# Altium PCB Esquematico.PcbDoc
Units mm, origin at the board's own origin, x right, y up, seen from the top; angles counter-clockwise.
Board outline 110.33 x 115.65 mm, 2 copper layers (Top Layer, Bottom Layer); 132 components, 89 nets, 403 pads, 37 vias.
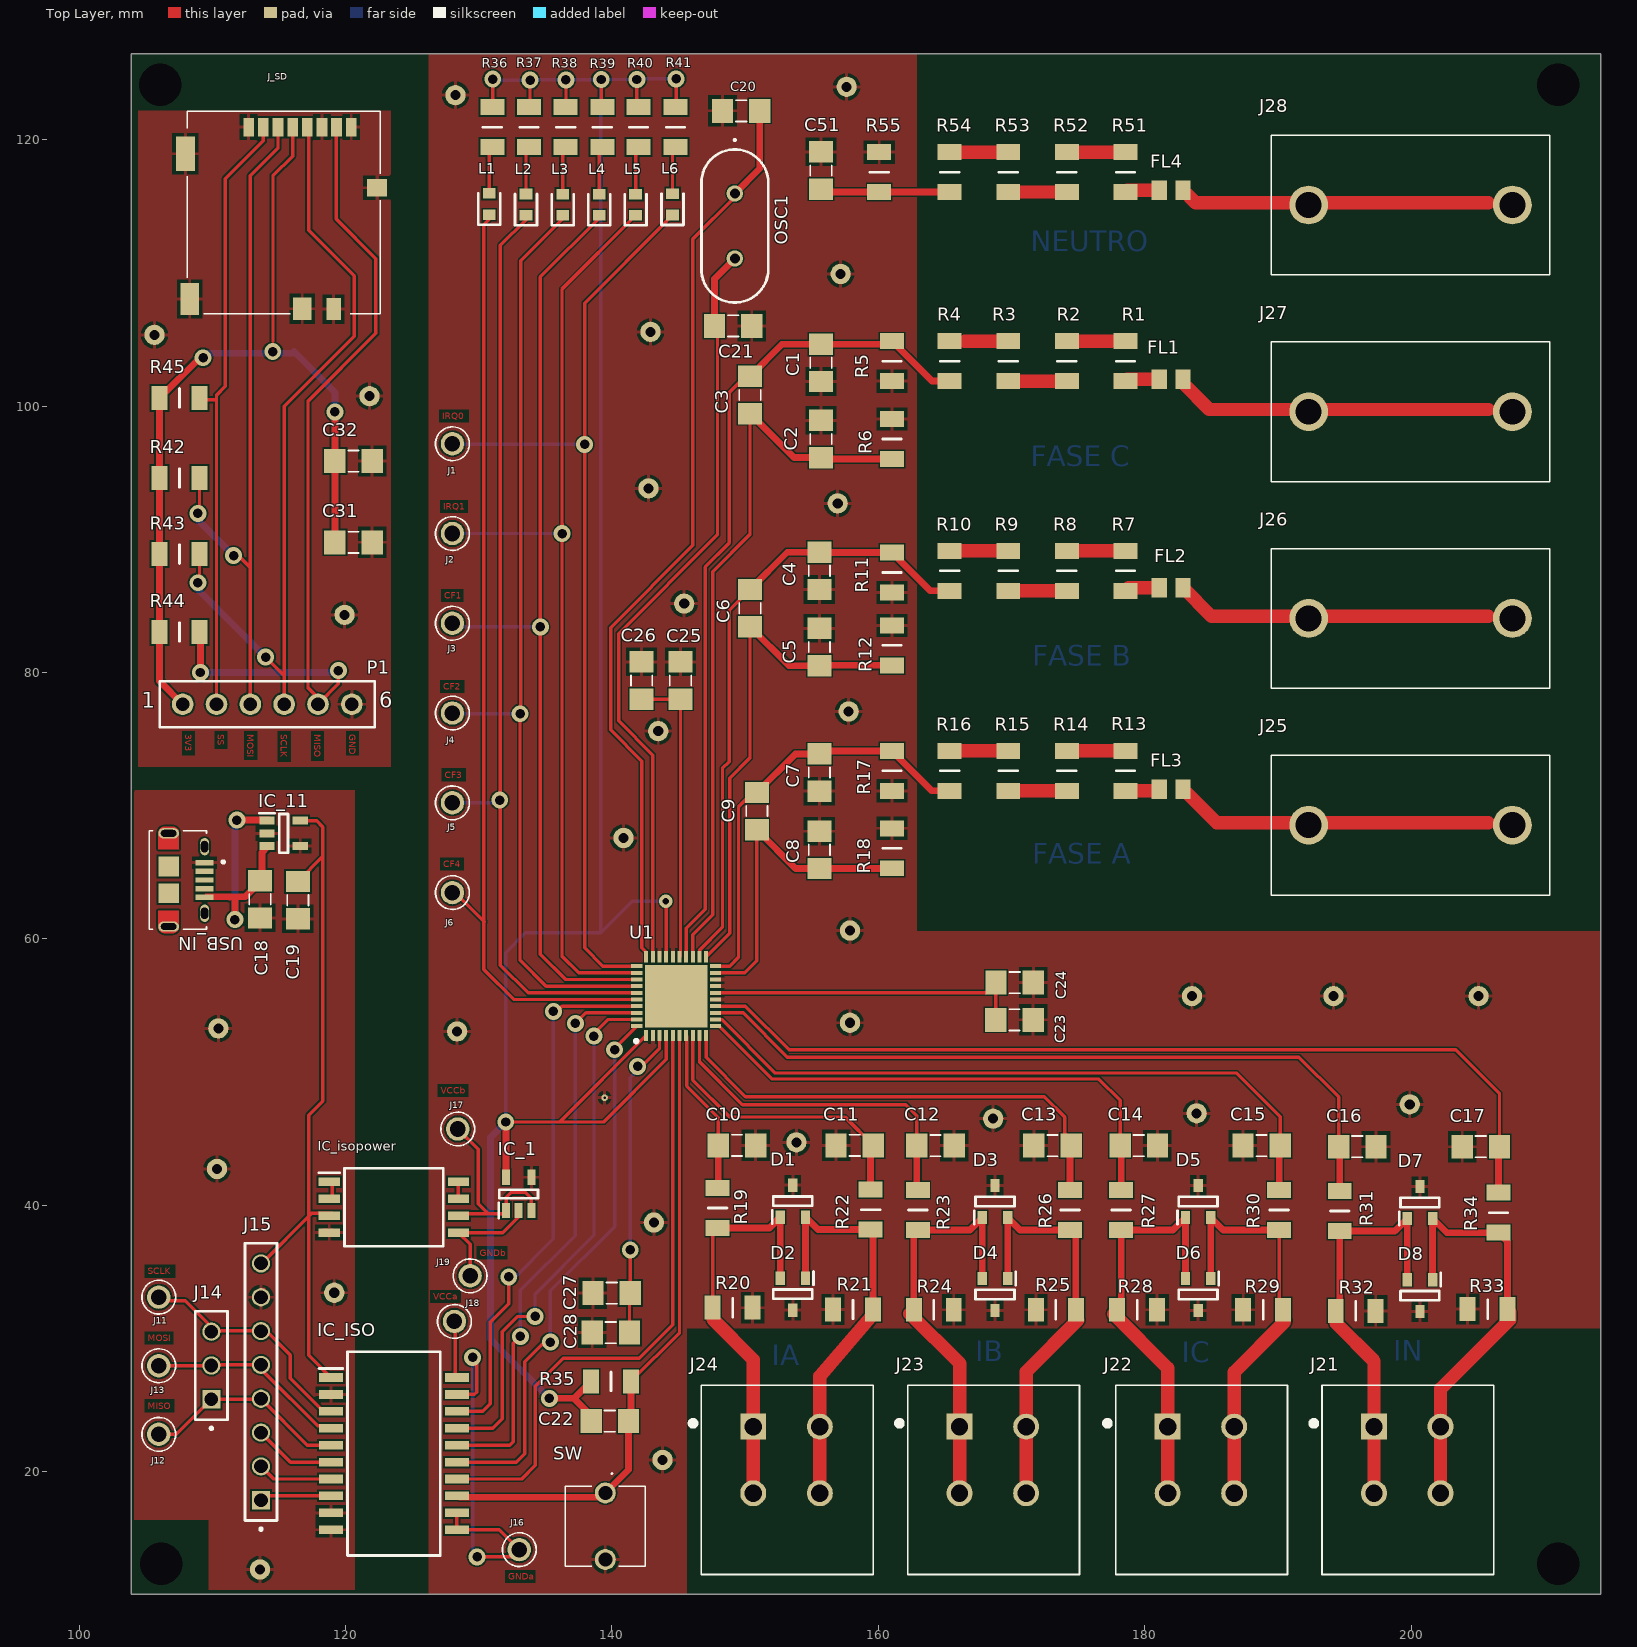
[diagram p0: Top Layer view]
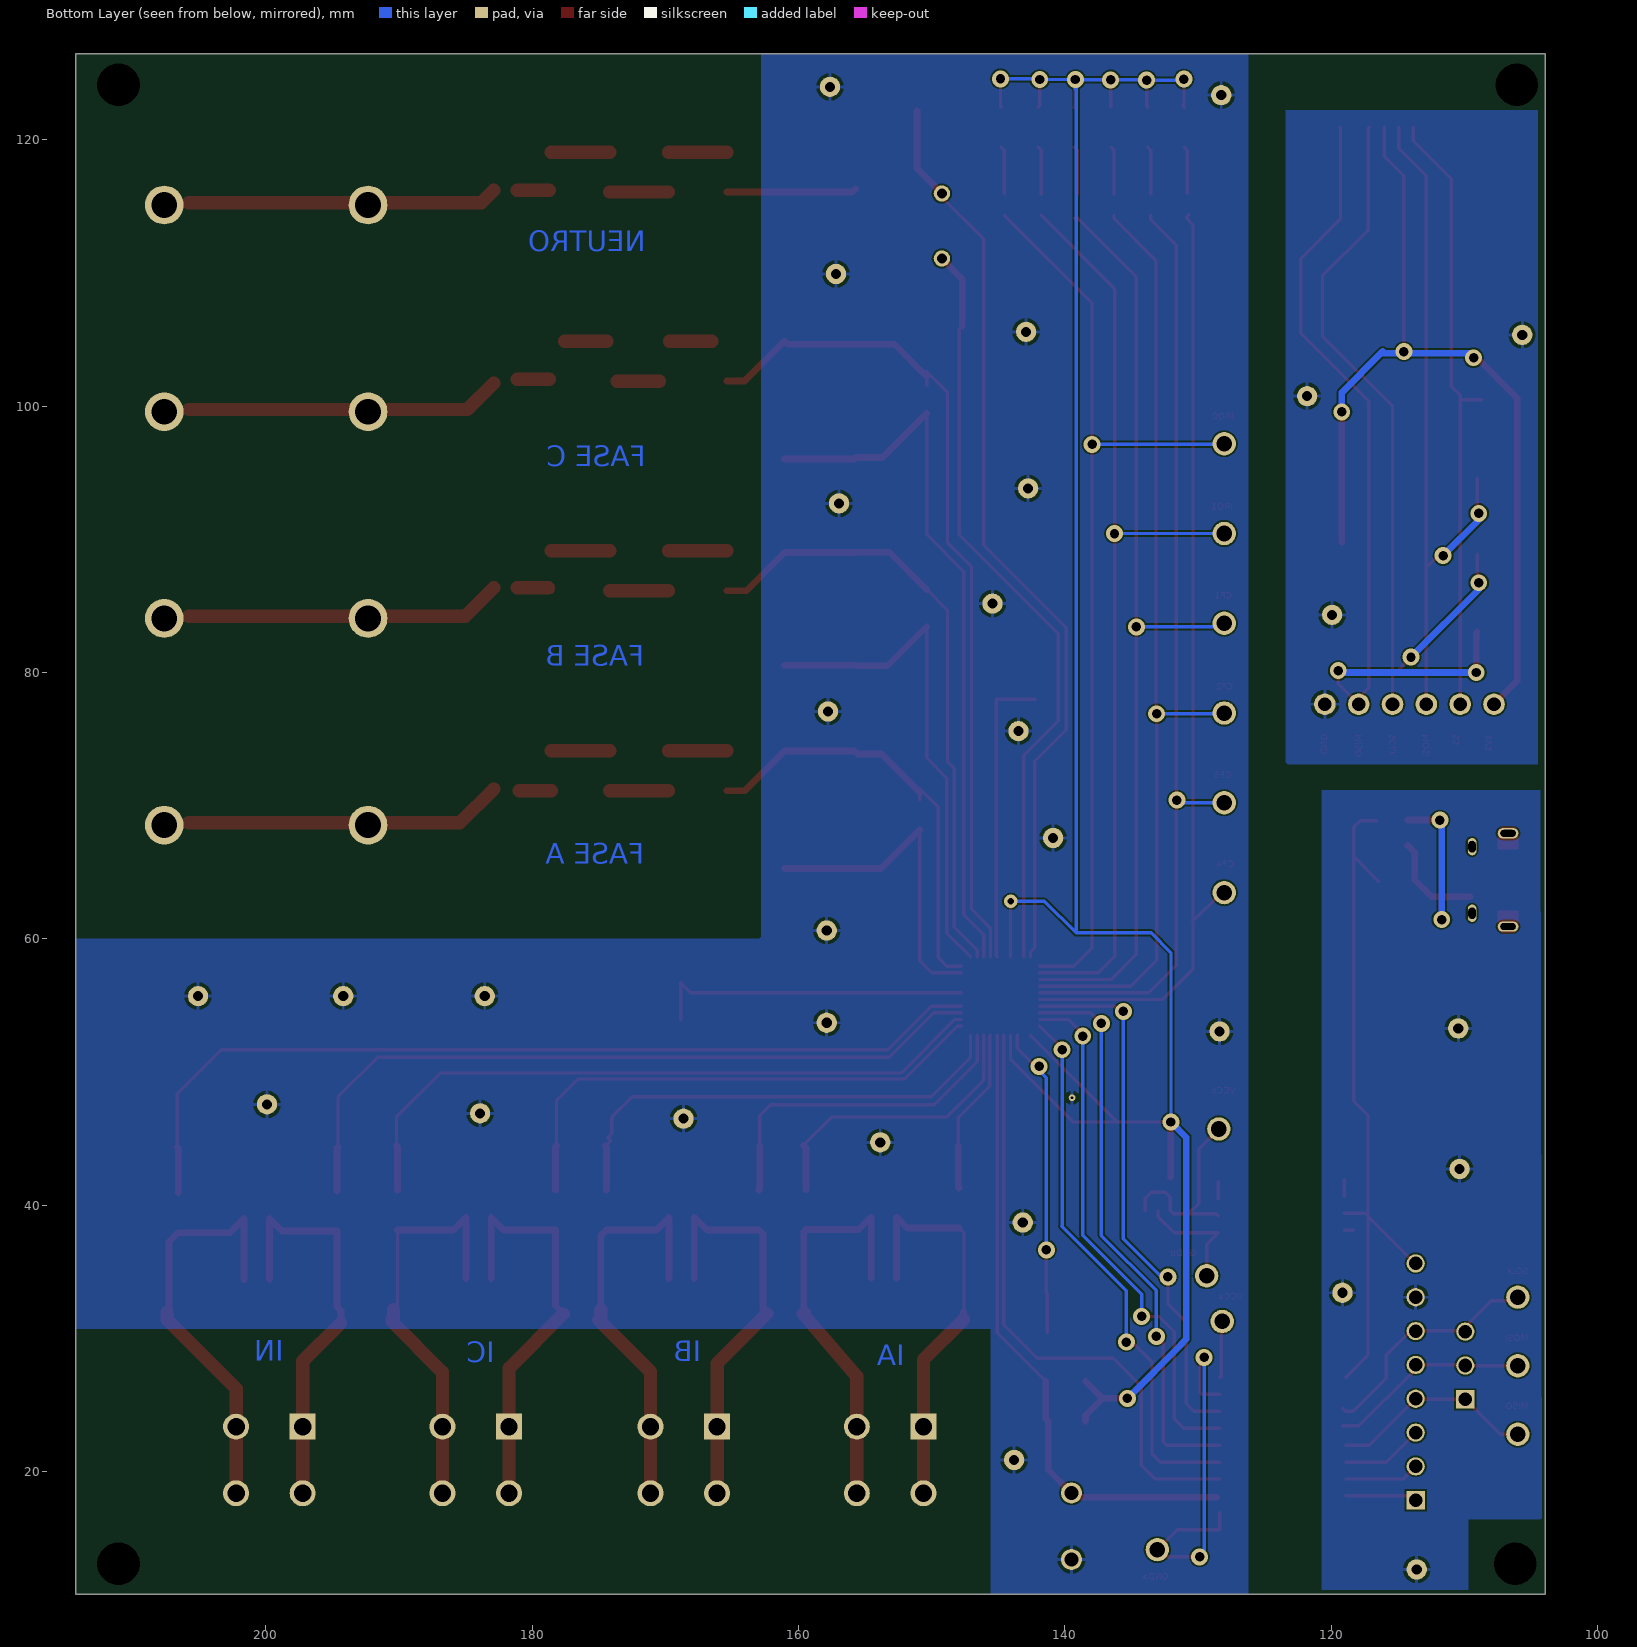
[diagram p1: Bottom Layer view, seen from below]
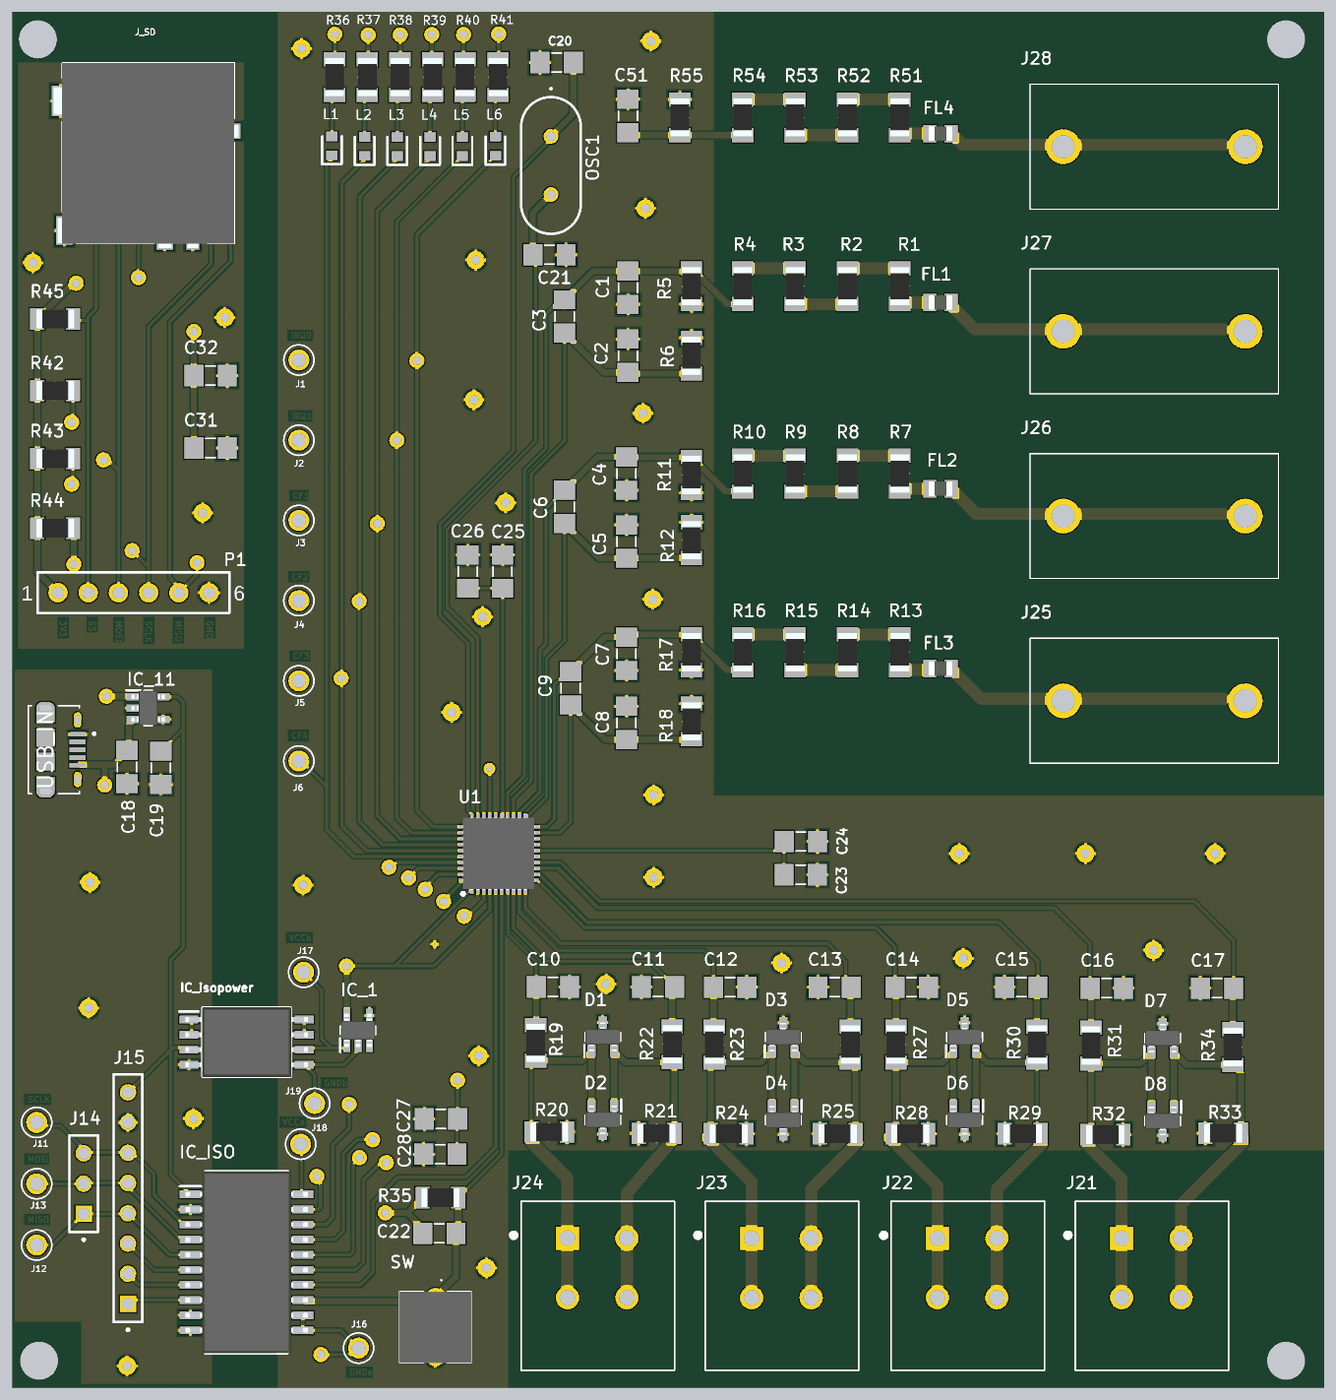
[diagram p2: 3D render of the assembled board from above, using the file's embedded part models]

## Layer stack, top to bottom
Top Solder: solder mask 0.0102, Solder Resist, Dk 3.5
Top Layer: signal copper 0.0356
Dielectric 1: dielectric 0.32, FR-4, Dk 4.8
Bottom Layer: signal copper 0.0356
Bottom Solder: solder mask 0.0102, Solder Resist, Dk 3.5

## Board outline
104.1,126.45 214.25,126.45 214.25,10.8 103.925,10.8 103.925,126.45

## Design rules (kind name [scope] priority, off if disabled: settings)
Clearance [All] p1: gap=0.127 ignorepadtopadclearanceinfootprint=TRUE
HoleSize [All] p1: absolutevalues=TRUE maxlimit=4 minlimit=0.025 maxpercent=80.000 minpercent=20.000
MinimumSolderMaskSliver [All] p1: minsoldermaskwidth=0.045
PolygonConnect [All] p1: connectstyle=Relief reliefconductorwidth=0.254 reliefentries=4 polygonreliefangle="90 Angle" airgapwidth=0.254
RoomDefinition SD-CARD [InComponentClass('SD-CARD')] p1 off: confinementstyle=ConfineIn formatcopy=TRUE lockcomponents=FALSE outline 123.4,122.275 104.15,122.275 104.15,73.275 123.4,73.275
RoomDefinition SPI [InComponentClass('SPI')] p2 off: confinementstyle=ConfineIn formatcopy=TRUE lockcomponents=FALSE outline 107.95,13.115 120.128,13.115 120.128,43.846 107.95,43.846
RoomDefinition PMIC [InComponentClass('PMIC')] p3 off: confinementstyle=ConfineIn formatcopy=TRUE lockcomponents=FALSE outline 126.6,48.025 153.251,48.025 153.251,125.975 126.6,125.975
RoomDefinition "Neutro Voltaje" [InComponentClass('Neutro Voltaje')] p4 off: confinementstyle=ConfineIn formatcopy=TRUE lockcomponents=FALSE outline 153.289,110.236 186.055,110.236 186.055,122.428 153.289,122.428
RoomDefinition MicroUSB [InComponentClass('MicroUSB')] p5 off: confinementstyle=ConfineIn formatcopy=TRUE lockcomponents=FALSE outline 121.85,58.5 121.85,71.073 103.925,71.073 103.925,58.5
RoomDefinition Filtro_VC [InComponentClass('Filtro_VC')] p6 off: confinementstyle=ConfineIn formatcopy=TRUE lockcomponents=FALSE outline 147.066,93.599 186.055,93.599 186.055,108.458 147.066,108.458
RoomDefinition Filtro_VB [InComponentClass('Filtro_VB')] p7 off: confinementstyle=ConfineIn formatcopy=TRUE lockcomponents=FALSE outline 146.939,78.74 185.928,78.74 185.928,92.837 146.939,92.837
RoomDefinition Filtro_VA [InComponentClass('Filtro_VA')] p8 off: confinementstyle=ConfineIn formatcopy=TRUE lockcomponents=FALSE outline 147.066,63.373 185.801,63.373 185.801,77.343 147.066,77.343
RoomDefinition Esquematico1 [InComponentClass('Esquematico1')] p9 off: confinementstyle=ConfineIn formatcopy=TRUE lockcomponents=FALSE outline 145.196,10.675 206.813,10.675 206.813,29.17 145.196,29.17
RoomDefinition "ENTRADA CORRIENTE N" [InComponentClass('ENTRADA CORRIENTE N')] p10 off: confinementstyle=ConfineIn formatcopy=TRUE lockcomponents=FALSE outline 192.288,30.398 209.052,30.398 209.052,48.456 192.288,48.456
RoomDefinition "ENTRADA CORRIENTE C" [InComponentClass('ENTRADA CORRIENTE C')] p11 off: confinementstyle=ConfineIn formatcopy=TRUE lockcomponents=FALSE outline 176.077,30.375 191.825,30.375 191.825,48.409 176.077,48.409
RoomDefinition "ENTRADA CORRIENTE B" [InComponentClass('ENTRADA CORRIENTE B')] p12 off: confinementstyle=ConfineIn formatcopy=TRUE lockcomponents=FALSE outline 161.372,30.375 175.85,30.375 175.85,48.409 161.372,48.409
RoomDefinition "ENTRADA CORRIENTE A" [InComponentClass('ENTRADA CORRIENTE A')] p13 off: confinementstyle=ConfineIn formatcopy=TRUE lockcomponents=FALSE outline 145.835,30.4 161.075,30.4 161.075,48.434 145.835,48.434
RoutingVias [All] p1: holewidth=0.711 width=1.27 viastyle="Through Hole" minholewidth=0.711 minwidth=1.27 maxholewidth=0.711 maxwidth=1.27
ShortCircuit [All] p1: allowed=TRUE
SilkToSilkClearance [All] p1: silktosilkclearance=0.08
SilkToSolderMaskClearance [IsPad] p1: minsilkscreentomaskgap=0.1 clearancetoexposedcopper=TRUE
SolderMaskExpansion [All] p1: expansion=0.102
Width [All] p1: maxlimit=1 minlimit=0.254 preferedwidth=0.254
25 further rules are at their usual default settings.

## Classes and differential pairs
channel class Filtro: Filtro_VA Filtro_VB Filtro_VC
channel class CURRENT_IN: "ENTRADA CORRIENTE A" "ENTRADA CORRIENTE B" "ENTRADA CORRIENTE C" "ENTRADA CORRIENTE N"
component class SPI: IC_1 IC_ISO IC_isopower J11 J12 J13 J14 J15 J16 J17 J18 J19
component class SD-CARD: C31 C32 J_SD P1 R42 R43 R44 R45
component class PMIC: C1_Filtro_VA C1_Filtro_VB C1_Filtro_VC C2_Filtro_VA C2_Filtro_VB C2_Filtro_VC C3_Filtro_VA C3_Filtro_VB C3_Filtro_VC C20 C21 C22 C23 C24 C25 C26 C27 C28 J1 J2 J3 J4 J5 J6 L1 L2 L3 L4 L5 L6 OSC1 R1_Filtro_VB R1_Filtro_VC R2_Filtro_VC R3_Filtro_VC R4_Filtro_VC R5_Filtro_VC R6_Filtro_VC R35 R36 R37 R38 R39 R40 R41 SW U1
component class "Neutro Voltaje": C51 FL4 R51 R52 R53 R54 R55
component class MicroUSB: "C1_ENTRADA CORRIENTE A" "C2_ENTRADA CORRIENTE A" C18 C19 IC_11 USB_IN
component class Filtro_VC: C1 C1_Filtro_VC C2 C2_Filtro_VC C3 C3_Filtro_VC FL1 FL1_Filtro_VC R1 R1_Filtro_VC R2 R2_Filtro_VC R3 R3_Filtro_VC R4 R4_Filtro_VC R5 R5_Filtro_VC R6 R6_Filtro_VC
component class Filtro_VB: C1_Filtro_VB C2_Filtro_VB C3_Filtro_VB C4 C5 C6 FL1_Filtro_VB FL2 R1_Filtro_VB R2_Filtro_VB R3_Filtro_VB R4_Filtro_VB R5_Filtro_VB R6_Filtro_VB R7 R8 R9 R10 R11 R12
component class Filtro_VA: C1_Filtro_VA C2_Filtro_VA C3_Filtro_VA C7 C8 C9 FL1_Filtro_VA FL3 R1_Filtro_VA R2_Filtro_VA R3_Filtro_VA R4_Filtro_VA R5_Filtro_VA R6_Filtro_VA R13 R14 R15 R16 R17 R18
component class Esquematico1: J21 J22 J23 J24 J25 J26 J27 J28
component class "ENTRADA CORRIENTE N": C16 C17 D7 D8 R31 R32 R33 R34
component class "ENTRADA CORRIENTE C": C14 C15 D5 D6 R27 R28 R29 R30
component class "ENTRADA CORRIENTE B": C12 C13 D3 D4 R23 R24 R25 R26
component class "ENTRADA CORRIENTE A": "C1_ENTRADA CORRIENTE A" "C2_ENTRADA CORRIENTE A" C10 C11 D1 "D1_ENTRADA CORRIENTE A" D2 "D2_ENTRADA CORRIENTE A" "R1_ENTRADA CORRIENTE A" "R2_ENTRADA CORRIENTE A" "R3_ENTRADA CORRIENTE A" "R4_ENTRADA CORRIENTE A" R19 R20 R21 R22

## Components (designator, comment, footprint, x,y, rotation, side; value= is the part's Value field where it differs from the comment)
C1 "22nF" CAPC3216X190 155.702,103.248 r90 top
C2 "22nF" CAPC3216X190 155.702,97.536 r90 top
C3 "22nF" CAPC3216X190 150.368,100.838 r90 top
C4 "22nF" CAPC3216X190 155.575,87.63 r90 top (schematic designator C1)
C5 "22nF" CAPC3216X190 155.575,81.915 r90 top (schematic designator C2)
C6 "22nF" CAPC3216X190 150.368,84.836 r90 top (schematic designator C3)
C7 "22nF" CAPC3216X190 155.575,72.491 r90 top (schematic designator C1)
C8 "22nF" CAPC3216X190 155.575,66.679 r90 top (schematic designator C2)
C9 "22nF" CAPC3216X190 150.876,69.596 r90 top (schematic designator C3)
C10 "22nF" CAPC3216X190 149.391,44.497 r180 top (schematic designator C2)
C11 "22nF" CAPC3216X190 158.228,44.497 r0 top (schematic designator C1)
C12 "22nF" CAPC3216X190 164.293,44.472 r180 top (schematic designator C2)
C13 "22nF" CAPC3216X190 173.08,44.472 r0 top (schematic designator C1)
C14 "22nF" CAPC3216X190 179.559,44.472 r180 top (schematic designator C2)
C15 "22nF" CAPC3216X190 188.777,44.472 r0 top (schematic designator C1)
C16 "22nF" CAPC3216X190 195.971,44.392 r180 top (schematic designator C2)
C17 "22nF" CAPC3216X190 205.246,44.392 r0 top (schematic designator C1)
C18 "22u" CAPC3216X190 113.572,62.972 r90 top
C19 "10u" CAPC3216X190 116.416,62.904 r270 top
C20 "18pF" CAPC3216X190 149.7,122.175 r0 top
C21 "18pF" CAPC3216X190 149.1,106.025 r180 top
C22 "1uF" CAPC3216X190 139.838,23.782 r0 top
C23 "100nF" CAPC3216X190 170.225,53.925 r180 top
C24 "4.7uF" CAPC3216X190 170.242,56.715 r0 top
C25 "100nF" CAPC3216X190 145.15,79.4 r270 top
C26 "4.7uF" CAPC3216X190 142.229,79.4 r90 top
C27 "100nF" CAPC3216X190 139.975,33.4 r0 top
C28 "4.7uF" CAPC3216X190 139.92,30.438 r180 top
C31 "100nF" CAPC3216X190 120.599,89.779 r180 top
C32 "10uF" CAPC3216X190 120.599,95.875 r180 top
C51 "22nF" CAPC3216X190 155.702,117.695 r270 top
D1 "MMBD4148SE" SOT95P240X120-3N 153.582,40.306 r90 top
D2 "MMBD4148SE" SOT95P240X120-3N 153.582,33.321 r270 top
D3 "MMBD4148SE" SOT95P240X120-3N 168.762,40.281 r90 top (schematic designator D1)
D4 "MMBD4148SE" SOT95P240X120-3N 168.762,33.296 r270 top (schematic designator D2)
D5 "MMBD4148SE" SOT95P240X120-3N 184.012,40.281 r90 top (schematic designator D1)
D6 "MMBD4148SE" SOT95P240X120-3N 184.012,33.296 r270 top (schematic designator D2)
D7 "MMBD4148SE" SOT95P240X120-3N 200.67,40.201 r90 top (schematic designator D1)
D8 "MMBD4148SE" SOT95P240X120-3N 200.67,33.216 r270 top (schematic designator D2)
FL1 "BLM21BD152SN1D" BEADC2012X105N 181.991,102.011 r0 top
FL2 "BLM21BD152SN1D" BEADC2012X105N 181.991,86.36 r0 top (schematic designator FL1)
FL3 "BLM21BD152SN1D" BEADC2012X105N 181.991,71.247 r0 top (schematic designator FL1)
FL4 "BLM21BD152SN1D" BEADC2012X105N 181.991,116.205 r180 top
IC_1 "ADP122AUJZ-3.3-R7" SOT95P280X100-5N 133,40.85 r90 top
IC_11 "ADP122AUJZ-3.3-R7" SOT95P280X100-5N 115.35,67.925 r0 top
IC_ISO "ADUM4151BRIZ" SOIC127P1031X264-20N 123.625,21.35 r0 top
IC_isopower "ADUM5028-3BRIZ" SOIC127P1031X265-8N 123.625,39.85 r0 top
J1 "5001" KEYSTONE_5001 128.025,97.175 r180 top
J2 "5001" KEYSTONE_5001 128.025,90.435 r180 top
J3 "5001" KEYSTONE_5001 128.025,83.695 r180 top
J4 "5001" KEYSTONE_5001 128.025,76.955 r180 top
J5 "5001" KEYSTONE_5001 128.025,70.215 r180 top
J6 "5001" KEYSTONE_5001 128.025,63.475 r180 top
J11 "5001" KEYSTONE_5001 105.975,33.1 r0 top
J12 "5001" KEYSTONE_5001 105.975,22.8 r0 top
J13 "5001" KEYSTONE_5001 105.975,27.95 r0 top
J14 "ESQ-103-14-G-S" SAMTEC_ESQ-103-14-G-S 109.925,25.425 r90 top
J15 "ESQ-108-12-T-S" SAMTEC_ESQ-108-12-T-S 113.65,17.85 r90 top
J16 "5001" KEYSTONE_5001 133.045,14.143 r0 top
J17 "5001" KEYSTONE_5001 128.425,45.725 r0 top
J18 "5001" KEYSTONE_5001 128.175,31.275 r0 top
J19 "5001" KEYSTONE_5001 129.35,34.7 r0 top
J21 "2834082-1" TE_2834082-1 197.219,23.375 r0 top
J22 "2834082-1" TE_2834082-1 181.725,23.375 r0 top
J23 "2834082-1" TE_2834082-1 166.104,23.375 r0 top
J24 "2834082-1" TE_2834082-1 150.61,23.375 r0 top
J25 "571-0100" 5710100 192.313,68.54 r0 top
J26 "571-0100" 5710100 192.313,84.061 r0 top
J27 "571-0100" 5710100 192.313,99.581 r0 top
J28 "571-0100" 5710100 192.313,115.102 r0 top
J_SD "PJS008-2120-0" PJS00821200 115.35,106.95 r90 top
L1 "APT1608LZGCK" LEDC1608X85N 130.8,115.175 r90 top
L2 "APT1608LZGCK" LEDC1608X85N 133.55,115.125 r90 top
L3 "APT1608LZGCK" LEDC1608X85N 136.3,115.121 r90 top
L4 "APT1608LZGCK" LEDC1608X85N 139.051,115.121 r90 top
L5 "APT1608LZGCK" LEDC1608X85N 141.775,115.121 r90 top
L6 "APT1608LZGCK" LEDC1608X85N 144.551,115.15 r90 top
OSC1 "24.576MHz" HC-49S_1 149.225,113.525 r270 top
P1 "Header-Male-2.54_1x6" SAMTEC-TSW-106-07-X-S 114.119,77.616 r0 top
R1 "200k" RESC3216X75N 178.562,103.378 r270 top
R2 "200k" RESC3216X75N 174.159,103.378 r90 top
R3 "200k" RESC3216X75N 169.757,103.378 r270 top
R4 "200k" RESC3216X75N 165.354,103.378 r90 top
R5 "1k" RESC3216X75N 161.036,103.375 r90 top
R6 "1k" RESC3216X75N 161.036,97.536 r90 top
R7 "200k" RESC3216X75N 178.562,87.63 r270 top (schematic designator R1)
R8 "200k" RESC3216X75N 174.159,87.63 r90 top (schematic designator R2)
R9 "200k" RESC3216X75N 169.757,87.63 r270 top (schematic designator R3)
R10 "200k" RESC3216X75N 165.354,87.63 r90 top (schematic designator R4)
R11 "1k" RESC3216X75N 161.036,87.507 r90 top (schematic designator R5)
R12 "1k" RESC3216X75N 161.036,82.038 r90 top (schematic designator R6)
R13 "200k" RESC3216X75N 178.562,72.614 r270 top (schematic designator R1)
R14 "200k" RESC3216X75N 174.159,72.614 r90 top (schematic designator R2)
R15 "200k" RESC3216X75N 169.757,72.614 r270 top (schematic designator R3)
R16 "200k" RESC3216X75N 165.354,72.614 r90 top (schematic designator R4)
R17 "1k" RESC3216X75N 161.036,72.614 r90 top (schematic designator R5)
R18 "1k" RESC3216X75N 161.036,66.802 r90 top (schematic designator R6)
R19 "1k" RESC3216X75N 147.941,39.798 r90 top (schematic designator R4)
R20 "5" RESC3216X75N 149.067,32.305 r180 top (schematic designator R3)
R21 "5" RESC3216X75N 158.097,32.178 r180 top (schematic designator R1)
R22 "1k" RESC3216X75N 159.424,39.671 r270 top (schematic designator R2)
R23 "1k" RESC3216X75N 162.966,39.646 r90 top (schematic designator R4)
R24 "5" RESC3216X75N 164.166,32.153 r180 top (schematic designator R3)
R25 "5" RESC3216X75N 173.334,32.153 r180 top (schematic designator R1)
R26 "1k" RESC3216X75N 174.403,39.646 r270 top (schematic designator R2)
R27 "1k" RESC3216X75N 178.236,39.646 r90 top (schematic designator R4)
R28 "5" RESC3216X75N 179.436,32.153 r180 top (schematic designator R3)
R29 "5" RESC3216X75N 188.9,32.153 r180 top (schematic designator R1)
R30 "1k" RESC3216X75N 190.1,39.646 r270 top (schematic designator R2)
R31 "1k" RESC3216X75N 194.648,39.566 r90 top (schematic designator R4)
R32 "5" RESC3216X75N 195.848,32.073 r180 top (schematic designator R3)
R33 "5" RESC3216X75N 205.75,32.2 r180 top (schematic designator R1)
R34 "1k" RESC3216X75N 206.569,39.439 r270 top (schematic designator R2)
R35 "10K" RESC3216X75N 139.925,26.775 r180 top
R36 "1k5" RESC3216X75N 131.025,120.95 r90 top
R37 "1k5" RESC3216X75N 133.775,120.95 r90 top
R38 "1k5" RESC3216X75N 136.525,120.95 r90 top
R39 "1k5" RESC3216X75N 139.276,120.95 r90 top
R40 "1k5" RESC3216X75N 142,120.95 r90 top
R41 "1k5" RESC3216X75N 144.776,120.95 r90 top
R42 "10k" RESC3216X75N 107.531,94.605 r180 top
R43 "10k" RESC3216X75N 107.531,88.89 r180 top
R44 "10k" RESC3216X75N 107.531,83.048 r180 top
R45 "10k" RESC3216X75N 107.531,100.62 r180 top
R51 "200k" RESC3216X75N 178.562,117.572 r270 top
R52 "200k" RESC3216X75N 174.159,117.572 r90 top
R53 "200k" RESC3216X75N 169.757,117.572 r270 top
R54 "200k" RESC3216X75N 165.354,117.572 r90 top
R55 "1k" RESC3216X75N 160.068,117.572 r270 top
SW "EVQ-22705R" EVQ22705R 139.5,15.9 r270 top
U1 "ADE9000" QFN50P600X600X80-41N 144.825,55.7 r90 top
USB_IN "10118194-0001LF" AMPHENOL_10118194-0001LF 106.714,64.425 r270 top

## Footprints (in the part's own frame and the unit in brackets; to place one, negate y for a bottom-side part, rotate by r counter-clockwise, add the part's x,y. Pads: shape width x height; smd on the part's side, far side on the other; paste and mask are expansions set on the pad)
5710100 [mm]
  round 2.91 hole 1.94: 1(0,0) 2(15.3,0)
  silkscreen extent -2.8,-5.25 18.1,5.25
AMPHENOL_10118194-0001LF [mm]
  rect 0.4x1.35 smd: 1(-1.3,2.7) 2(-0.65,2.7) 3(0,2.7) 4(0.65,2.7) 5(1.3,2.7)
  oval 1.3x0.65 hole 0.55 slot 0.85 at 0 deg: S1(-2.5,2.7) S2(2.5,2.7)
  oval 0.775x1.55 hole 0.5 slot 1.15 at 90 deg: S3(-3.5,0) S6(3.5,0)
  rect 1.5x1.55 smd: S4(-1,0) S5(1,0)
  Top Layer region: 193 vertices and 0 holes, not listed, extent 2.3,-0.78 4,0.775
  Top Layer region: 193 vertices and 0 holes, not listed, extent -4,-0.775 -2.3,0.78
  silkscreen extent -3.7,-1.45 3.7,4.2
BEADC2012X105N [mm]
  rect 1.14x1.47 smd: 1(-0.89,0) 2(0.89,0)
  body extent -1,-0.63 1,0.63, height 1.05
CAPC3216X190 [mm]
  rect 1.6x1.8 smd: 1(-1.4,0) 2(1.4,0)
  silkscreen extent -0.4,-0.8 0.4,0.8
EVQ22705R [mm]
  round 1.575 hole 1.05: A1(-2.5,0) B1(2.5,0)
  silkscreen extent -4,-3 3,3, body extent -3,-3 3,3, height 5.1
HC-49S_1 [mm]
  round 1.23 hole 0.755: 1(-2.44,0) 2(2.44,0)
  silkscreen extent -6.51,-2.5 5.75,2.5
KEYSTONE_5001 [mm]
  round 1.755 hole 1.17: 1(0,0)
  silkscreen extent -1.27,-1.27 1.27,1.27
LEDC1608X85N [mm]
  rect 0.8x0.95 smd: 1(-0.8,0) 2(0.8,0)
  silkscreen extent -1.55,-0.83 0.8,0.82
PJS00821200 [mm]
  rect 1.4x0.8 smd: 1(14,2.625) 2(14,1.525) 3(14,0.425) 4(14,-0.675) 5(14,-1.775) 6(14,-2.875) 7(14,-3.975) 8(14,-5.075)
  rect 1.3x1.5 smd: CD1(9.45,-7)
  rect 2.6x1.45 smd: G1(12,7.375)
  rect 2.4x1.4 smd: G2(1.1,7.05)
  rect 1.72x1.4 smd: G3(0.36,-1.4)
  rect 1.67x1.1 smd: MP1(0.335,-3.75)
  silkscreen extent 0,-7.25 15.2,7.25, body extent -0.39,-7.62 15.2,7.96, height 1.6
QFN50P600X600X80-41N [mm]
  rect 0.85x0.3 smd: 1(-2.95,2.25) 2(-2.95,1.75) 3(-2.95,1.25) 4(-2.95,0.75) 5(-2.95,0.25) 6(-2.95,-0.25) 7(-2.95,-0.75) 8(-2.95,-1.25) 9(-2.95,-1.75) 10(-2.95,-2.25) 21(2.95,-2.25) 22(2.95,-1.75) 23(2.95,-1.25) 24(2.95,-0.75) 25(2.95,-0.25) 26(2.95,0.25) 27(2.95,0.75) 28(2.95,1.25) 29(2.95,1.75) 30(2.95,2.25)
  rect 0.3x0.85 smd: 11(-2.25,-2.95) 12(-1.75,-2.95) 13(-1.25,-2.95) 14(-0.75,-2.95) 15(-0.25,-2.95) 16(0.25,-2.95) 17(0.75,-2.95) 18(1.25,-2.95) 19(1.75,-2.95) 20(2.25,-2.95) 31(2.25,2.95) 32(1.75,2.95) 33(1.25,2.95) 34(0.75,2.95) 35(0.25,2.95) 36(-0.25,2.95) 37(-0.75,2.95) 38(-1.25,2.95) 39(-1.75,2.95) 40(-2.25,2.95)
  rect 4.7x4.7 smd: 41(0,0)
  silkscreen extent -3.5,2.87 -3.25,3.12, body extent -3.05,-3.05 3.05,3.05, height 0.8
RESC3216X75N [mm]
  rect 1.2x1.8 smd: 1(-1.5,0) 2(1.5,0)
  silkscreen extent 0,-0.7 0,0.7, body extent -1.6,-0.8 1.6,0.8, height 0.75
SAMTEC-TSW-106-07-X-S [mm]
  round 1.62 hole 1.02: 1(-6.35,0) 2(-3.81,0) 3(-1.27,0) 4(1.27,0) 5(3.81,0) 6(6.35,0)
  silkscreen extent -8.07,-1.72 8.07,1.72
SAMTEC_ESQ-103-14-G-S [mm]
  rect 1.37x1.37 hole 1.02: 01(0,0)
  round 1.37 hole 1.02: 02(2.54,0) 03(5.08,0)
  silkscreen extent -2.27,-1.2 6.61,1.2
SAMTEC_ESQ-108-12-T-S [mm]
  rect 1.37x1.37 hole 1.02: 01(0,0)
  round 1.37 hole 1.02: 02(2.54,0) 03(5.08,0) 04(7.62,0) 05(10.16,0) 06(12.7,0) 07(15.24,0) 08(17.78,0)
  silkscreen extent -2.27,-1.2 19.31,1.2
SOIC127P1031X264-20N [mm]
  rect 1.8x0.65 smd: 1(-4.725,5.715) 2(-4.725,4.445) 3(-4.725,3.175) 4(-4.725,1.905) 5(-4.725,0.635) 6(-4.725,-0.635) 7(-4.725,-1.905) 8(-4.725,-3.175) 9(-4.725,-4.445) 10(-4.725,-5.715) 11(4.725,-5.715) 12(4.725,-4.445) 13(4.725,-3.175) 14(4.725,-1.905) 15(4.725,-0.635) 16(4.725,0.635) 17(4.725,1.905) 18(4.725,3.175) 19(4.725,4.445) 20(4.725,5.715)
  silkscreen extent -5.62,-7.65 3.48,7.65, body extent -5.16,-7.65 5.16,7.65, height 2.64
SOIC127P1031X265-8N [mm]
  rect 1.6x0.65 smd: 1(-4.85,1.905) 2(-4.85,0.635) 3(-4.85,-0.635) 4(-4.85,-1.905) 5(4.85,-1.905) 6(4.85,-0.635) 7(4.85,0.635) 8(4.85,1.905)
  silkscreen extent -5.65,-2.93 3.7,2.93, body extent -5.16,-2.93 5.16,2.93, height 2.65
SOT95P240X120-3N [mm]
  rect 1x0.7 smd: 1(-1.2,0.95) 2(-1.2,-0.95) 3(1.2,0)
  silkscreen extent -1.7,-1.46 0.35,1.55, body extent -1.2,-1.46 1.2,1.46, height 1.2
SOT95P280X100-5N [mm]
  rect 1.15x0.6 smd: 1(-1.25,0.95) 2(-1.25,0) 3(-1.25,-0.95) 4(1.25,-0.95) 5(1.25,0.95)
  silkscreen extent -1.82,-1.45 0.33,1.5, body extent -1.4,-1.45 1.4,1.45, height 1
TE_2834082-1 [mm]
  rect 1.95x1.95 hole 1.3: 1(0,0)
  round 1.95 hole 1.3: 1_1(0,-5) 2(5,0) 2_1(5,-5)
  silkscreen extent -4.72,-11.1 9,3.1

## Part data
C18 C19: library part 100nF, nameAlias=Value(F), spicePre=C, spiceSymbolName=Cap_RAD-0.1_US
C20 C21: library part 16pF, nameAlias=Value(F), spicePre=C, spiceSymbolName=Cap_RAD-0.1_US
C31 C32 R42 R43 R44 R45: BOM_Manufacturer Part=?
  C31 C32: nameAlias=Value(F), spicePre=C, spiceSymbolName=Capacitor
  R42 R43 R44 R45: nameAlias=Value(O), spicePre=R, spiceSymbolName=Resistor
D1 D2 D3 D4 D5 D6 D7 D8: "Diode", Manufacturer_Name="ON Semiconductor", Mouser Part Number=512-MMBD4148SE, Arrow Part Number=MMBD4148SE, Arrow Price/Stock=https://www.arrow.com/en/products/mmbd4148se/on-semiconductor, Datasheet Link=http://www.onsemi.com/pub/Collateral/MMBD4148SE-D.pdf, Height=1.2mm, Manufacturer_Part_Number=MMBD4148SE, Mouser Price/Stock=https://www.mouser.co.uk/ProductDetail/ON-Semiconductor-Fairchild/MMBD4148SE?qs=E58pcOqB2RIih%2Fj%252BJ4dF7g%3D%3D
FL1 FL2 FL3 FL4: "1.5 kOhms @ 100MHz 1 Signal Line Ferrite Bead 0805 (2012 Metric) 250mA 450mOhm", Package="2012 Murata", Availability=Good, Check_prices=https://www.snapeda.com/parts/BLM21BD152SN1D/Murata/view-part/290529/?ref=eda, MF=Murata, MP=BLM21BD152SN1D, Price=None, Purchase-URL=https://pricing.snapeda.com/search/part/BLM21BD152SN1D/?ref=eda, SnapEDA_Link=https://www.snapeda.com/parts/BLM21BD152SN1D/Murata/view-part/290529/?ref=snap
IC_1 IC_11: "Integrated Circuit", Manufacturer_Name="Analog Devices", Mouser Part Number=584-ADP122AUJZ-3.3R7, Arrow Part Number=ADP122AUJZ-3.3-R7, Arrow Price/Stock=https://www.arrow.com/en/products/adp122aujz-3.3-r7/analog-devices, Datasheet Link=http://uk.rs-online.com/web/p/products/9128071, Height=1mm, Manufacturer_Part_Number=ADP122AUJZ-3.3-R7, Mouser Price/Stock=https://www.mouser.co.uk/ProductDetail/Analog-Devices/ADP122AUJZ-33-R7?qs=BpaRKvA4VqERsawSFjb%252Blw%3D%3D
IC_ISO: "Integrated Circuit", Manufacturer_Name="Analog Devices", Mouser Part Number=584-ADUM4151BRIZ, Arrow Part Number=ADUM4151BRIZ, Arrow Price/Stock=https://www.arrow.com/en/products/adum4151briz/analog-devices, Datasheet Link=http://www.analog.com/media/en/technical-documentation/data-sheets/ADuM4151_4152_4153.pdf, Height=2.64mm, Manufacturer_Part_Number=ADUM4151BRIZ, Mouser Price/Stock=https://www.mouser.co.uk/ProductDetail/Analog-Devices/ADUM4151BRIZ?qs=iCT64eccu7hBfyU9ooJLRg%3D%3D
IC_isopower: "Integrated Circuit", Manufacturer_Name="Linear Technology", Mouser Part Number=584-ADUM5028-3BRIZ, Datasheet Link=https://componentsearchengine.com/Datasheets/1/ADUM5028-3BRIZ.pdf, Height=2.65mm, Manufacturer_Part_Number=ADUM5028-3BRIZ, Mouser Price/Stock=https://www.mouser.com/Search/Refine.aspx?Keyword=584-ADUM5028-3BRIZ
J1 J2 J3 J4 J5 J6 J11 J12 J13 J16 J17 J18 J19: "Conn Test Point SKT 1 POS ST Thru-Hole 1 Port", Package=None, Availability=Good, Check_prices=https://www.snapeda.com/parts/5001/Keystone%20Electronics/view-part/4775115/?ref=eda, MF="Keystone Electronics Corp.", MP=5001, Price=None, Purchase-URL=https://pricing.snapeda.com/search/part/5001/?ref=eda, SnapEDA_Link=https://www.snapeda.com/parts/5001/Keystone%20Electronics/view-part/4775115/?ref=snap
J14: "Conn Elevated Socket SKT 3 POS 2.54mm Solder ST Top Entry Thru-Hole Bulk", Package=None, Availability=Bad, MF=Samtec, MP=ESQ-103-14-G-S, Price=None, SnapEDA_Link=https://www.snapeda.com/parts/ESQ-103-14-G-S/Samtec/view-part/3463809/?ref=snap
J15: "Conn Elevated Socket SKT 8 POS 2.54mm Solder ST Top Entry Thru-Hole Tube", Package=None, Availability=Bad, MF=Samtec, MP=ESQ-108-12-T-S, Price=None, SnapEDA_Link=https://www.snapeda.com/parts/ESQ-108-12-T-S/Samtec/view-part/3520893/?ref=snap, Toby_UK-Purchase-URL=https://snapeda.com/shop?store=Toby+UK&id=3520893
J21 J22 J23 J24: "Conn PC Terminal Block 2 POS 5mm Solder ST Thru-Hole 20A/Contact Box/Carton", Package=None, Digi-Key_Part_Number=A124223-ND, Digi-Key_Purchase_URL=https://www.digikey.com/product-detail/en/te-connectivity-amp-connectors/2834082-1/A124223-ND/6012670?utm_source=snapeda&utm_medium=aggregator&utm_campaign=symbol, MF="TE Connectivity", MP=2834082-1, SnapEDA_Link=https://www.snapeda.com/parts/2834082-1/TE%20Connectivity%20AMP%20Connectors/view-part/2471183/?ref=snap, TE_purchase_URL=https://www.te.com/usa-en/product-2834082-1.html?te_bu=Cor&te_type=disp&te_campaign=seda_glo_cor-seda-global-disp-prtnr-fy19-seda-model-bom-cta_sma-317_1&elqCampaignId=32493
J25 J26 J27 J28: "Connector", Manufacturer_Name=Deltron, Mouser Part Number=164-6218, Datasheet Link=https://www.dem-uk.com/deltron-components/Data/Product_Downloads/deltron-571-0100-4mm-90deg-single-socket-data.pdf, Height=12.4mm, Manufacturer_Part_Number=571-0100, Mouser Price/Stock=https://www.mouser.co.uk/ProductDetail/Deltron/571-0100?qs=E2gf03EXmtoqC8%2FBhoPdrg%3D%3D
J_SD: "Connector", Manufacturer_Name=Yamaichi, Mouser Part Number=945-PJS008-2120-0, Datasheet Link=https://componentsearchengine.com/Datasheets/1/PJS008-2120-0.pdf, Height=1.5mm, Manufacturer_Part_Number=PJS008-2120-0, Mouser Price/Stock=https://www.mouser.co.uk/ProductDetail/Yamaichi-Electronics/PJS008-2120-0?qs=pDnM3xHIg41mTHT1wk7bvQ%3D%3D
L1 L2 L3 L4 L5 L6: "LED", Manufacturer_Name=Kingbright, Mouser Part Number=604-APT1608LZGCK, Arrow Part Number=APT1608LZGCK, Arrow Price/Stock=https://www.arrow.com/en/products/apt1608lzgck/kingbright, Datasheet Link=https://www.mouser.com/datasheet/2/216/APT1608LZGCK-535830.pdf, Height=0.85mm, Manufacturer_Part_Number=APT1608LZGCK, Mouser Price/Stock=https://www.mouser.co.uk/ProductDetail/Kingbright/APT1608LZGCK?qs=6oMev5NRZMFGFINT%2FafRYg%3D%3D
OSC1: library part 9B16000381, "Crystal or Oscillator", Manufacturer_Name=TXC, Arrow Part Number=9B16000381, Datasheet Link=http://www.txccorp.com/download/products/quartz_crystals/2015TXC_9B_33.pdf, Manufacturer_Part_Number=9B16000381
P1: BOM_Manufacturer=BOOMELE, BOM_Manufacturer Part=Header-Male-2.54_1x6, BOM_Supplier=LCSC, BOM_Supplier Part=C37208, spicePre=P
R1 R2 R3 R4 R7 R8 R9 R10 R13 R14 R15 R16 R51 R52 R53 R54: library part 330k, nameAlias=Value(O), spicePre=R, spiceSymbolName=Res_AXIAL-0.3(1/8W)_US
R20 R21 R24 R25 R28 R29 R32 R33: library part 1k, nameAlias=Value(O), spicePre=R, spiceSymbolName=Res_AXIAL-0.3(1/8W)_US
R36 R37 R38 R39 R40 R41: library part 10K, nameAlias=Value(O), spicePre=R, spiceSymbolName=Res_AXIAL-0.3(1/8W)_US
SW: "Switch", Manufacturer_Name=Panasonic, Mouser Part Number=667-EVQ-22705R, Arrow Part Number=EVQ-22705R, Arrow Price/Stock=https://www.arrow.com/en/products/evq-22705r/panasonic, Datasheet Link=https://www.mouser.com/datasheet/2/315/sw_lt_eng_5n_2r-1099494.pdf, Height=5mm, Manufacturer_Part_Number=EVQ-22705R, Mouser Price/Stock=https://www.mouser.co.uk/ProductDetail/Panasonic/EVQ-22705R?qs=WwqriLBepZv9VD2fPMeXiQ%3D%3D
U1: BOM_Manufacturer="Analog Devices", BOM_Manufacturer Part=ADE9000ACPZ-RL, BOM_Supplier=Digi-Key, BOM_Supplier Part=ADE9000ACPZ-RLCT-ND, spicePre=U
USB_IN: "USB - micro B USB 2.0 Receptacle Connector 5 Position Surface Mount, Right Angle; Through Hole", Package=None, Availability=Unavailable, MF="Amphenol ICC", MP=10118194-0001LF, Price=None, SnapEDA_Link=https://www.snapeda.com/parts/10118194-0001LF/Amphenol%20FCI/view-part/1413308/?ref=snap
C1 C2 C3 C4 C5 C6 C7 C8 C9 C10 C11 C12 C13 C14 C15 C16 C17 C22 C23 C25 C27 C51: nameAlias=Value(F), spicePre=C, spiceSymbolName=Cap_RAD-0.1_US
C24 C26 C28: nameAlias=Value(F), spicePre=C, spiceSymbolName=Cap_Electrolytic(TH)_D5.0XF2.0_US
R5 R6 R11 R12 R17 R18 R19 R22 R23 R26 R27 R30 R31 R34 R35 R55: nameAlias=Value(O), spicePre=R, spiceSymbolName=Res_AXIAL-0.3(1/8W)_US

## Free pads (board coordinates)
  round 0 on Mech16 paste+0 mask+0: 1(99.75,71.425) 1(100.725,71.425)
  round 1.524 hole 0.762: 1(105.65,105.35) 1(110.45,53.275) 1(113.575,12.65) 1(119.15,33.425) 1(128.375,53.05) 1(140.873,67.577) 1(143.475,75.6) 1(143.8,20.875) 1(156.95,92.7) 2(110.35,42.725) 2(145.425,85.175) 2(157.775,77.075) 3(119.925,84.325) 3(157.875,60.625) 3(183.55,55.7) 4(121.8,100.75) 4(157.875,53.7) 4(205.075,55.7) 5(128.25,123.35) 5(194.175,55.7) 5(199.9,47.575) 6(142.9,105.575) 7(142.75,93.825) 7(183.9,46.9) 8(157.175,109.925) 9(157.625,123.975) 9(168.625,46.5) 11(153.852,44.723) 12(143.15,38.7)
  round 0.5 hole 0.2: 1(139.45,48.075)
  round 3 hole 3.2 unplated: ""(106.075,124.125) ""(106.175,13.081) ""(211.05,13.081) ""(211.05,124.125)

## Via types
v1: diameter 1.27, hole 0.711, Top Layer to Bottom Layer, 36 vias
v2: diameter 1, hole 0.5, Top Layer to Bottom Layer, 1 vias

## Nets (pads, with @x,y where several pads share a name; then routed paths per layer and width w, separated by ;. In a path a pad name is that pad's centre, name@x,y a point inside that pad or via, vN(x,y) a via of type N, cw(c..) or ccw(c..) an arc to the next point about the centre after c; other vN are vias at no path point)
3V3_high: C22.1 IC_1.5 R35.2 R36.2 R37.2 R38.2 R39.2 R40.2 R41.2 U1.1 U1.4 U1.27 | length 182.7
  Top Layer w0.254: R36.2 131.15,122.575 131.05,122.675 v1(131.05,124.55) ; v1(132.025,46.25) 136.075,46.25 ; R37.2 133.85,122.525 v1(133.85,124.475) ; R38.2 136.5,122.475 136.55,122.525 v1(136.55,124.5) ; v1(139.2,124.525) 139.2,122.526 R39.2 ; v1(141.875,124.525) 141.875,122.575 R40.2 ; U1.1 136.075,46.25 ; v2(144.05,62.825) 144.075,62.8 U1.27 ; U1.4 144.075,50.95 139.375,46.25 136.075,46.25 ; R41.2 144.825,122.499 v1(144.825,124.575)
  Top Layer w0.508: v1(132.025,46.25) 132.05,46.225 IC_1.5 ; v1(135.3,25.5) 137.15,25.5 ; R35.2 137.15,25.5 ; C22.1 138.438,24.212 137.15,25.5
  Bottom Layer w0.254: v1(131.05,124.55) 131.05,124.025 131.5,124.475 v1(133.85,124.475) ; v1(132.025,46.25) 132.025,58.975 133.5,60.45 139.15,60.45 ; v1@133.925,123.925 134.5,124.5 v1(136.55,124.5) 138.575,124.5 139.15,123.925 139.15,123.75 ; v2(144.05,62.825) 141.525,62.825 139.15,60.45 ; v1(144.825,124.575) 142.397,124.575 141.926,124.104 141.875,124.154 v1(141.875,124.525) v1(139.2,124.525) 139.2,123.8 139.15,123.75 ; v1(133.85,124.475) 134.325,124.475 133.85,124 v1(133.85,124.475) ; 139.15,60.45 139.15,123.75
  Bottom Layer w0.508: v1(132.025,46.25) 130.875,45.1 130.875,29.963 131.2,29.638 131.162,29.638 v1(135.3,25.5)
3V3_low: C19.1 IC_11.5 IC_ISO.1 IC_isopower.3 J15.08 | length 53.6
  Top Layer w0.254: J15.08@113.875,35.81 117.235,39.17 ; C19.1 118.3,66.188 ; IC_11.5 117.825,68.875 118.3,68.4 118.3,66.188 ; IC_ISO.1 117.235,28.73 117.235,39.17 ; IC_isopower.3@119,39.395 117.46,39.395 117.235,39.17 ; 117.235,39.17 117.235,46.76 118.3,47.825 118.3,66.188
3V3_SD: C31.2 C32.2 J_SD.4 P1.1 R42.2 R43.2 R44.2 R45.2 | length 67.6
  Top Layer w0.254: 114.55,104.85 114.55,117.3 116.025,118.775 J_SD.4
  Top Layer w0.508: P1.1 106.031,79.354 R44.2 R43.2 R42.2 106.031,100.601 109.062,103.632 v1(109.304,103.632) ; C31.2 C32.2 v1(119.199,99.575)
  Bottom Layer w0.508: v1(109.304,103.632) 109.647,103.975 116.251,103.975 ; 116.127,104.1 116.251,103.975 ; v1(119.199,99.575) 119.199,101.028 116.251,103.975
  other v1: 114.531,104.1
!RESET: C22.2 IC_ISO.13 R35.1 SW.A1 U1.6 | length 47.7
  Top Layer w0.254: R35.1 145.075,30.425 U1.6
  Top Layer w0.508: IC_ISO.13@128.6,18.075 139.175,18.075 SW.A1 141.238,20.138 C22.2 141.425,23.969 R35.1
!RESET_low: IC_ISO.8 J15.01 | length 5.4
  Top Layer w0.254: J15.01 113.975,18.175 IC_ISO.8
!SS: IC_ISO.15 U1.40 | length 41.3
  Top Layer w0.254: IC_ISO.15 132.815,20.715 133.45,21.35 133.45,28.25 134.925,29.725 v1(135.375,29.725) ; v1(140.2,51.675) 140.2,51.775 U1.40
  Bottom Layer w0.254: v1(135.375,29.725) 135.375,33.575 140.2,38.4 ; v1(140.2,51.675) 140.2,38.4 ; 140.225,38.425 140.2,38.4
!SS_low: IC_ISO.6 J15.03 | length 6.2
  Top Layer w0.254: J15.03 115.865,20.715 IC_ISO.6
CF1: J3.1 L4.1 U1.33 | length 72.1
  Top Layer w0.254: L4.1@139.263,114.109 139.034,114.109 134.625,109.7 v1(134.625,83.425) 134.625,58.85 136.525,56.95 U1.33
  Bottom Layer w0.254: J3.1 128.295,83.425 v1(134.625,83.425)
CF2: J4.1 L3.1 U1.34 | length 71.9
  Top Layer w0.254: L3.1 136.3,114.075 133.15,110.925 133.15,77.225 133.1,77.175 v1(133.1,76.9) 133.1,58.4 135.05,56.45 U1.34
  Bottom Layer w0.254: J4.1 128.08,76.9 v1(133.1,76.9)
CF3: J5.1 L2.1 U1.35 | length 72.6
  Top Layer w0.254: v1(131.575,70.425) 131.575,70.95 v1@131.625,71 ; L2.1 133.55,114 131.625,112.075 v1@131.625,71 ; U1.35 133.7,55.95 131.625,58.025 v1@131.625,71
  Bottom Layer w0.254: J5.1 131.56,70.215 131.575,70.2 v1(131.575,70.425)
CF4: J6.1 L1.1 U1.36 | length 72.7
  Top Layer w0.254: J6.1 128.225,63.475 130.375,61.325 ; L1.1@130.7,114.375 130.85,114.225 130.85,114.1 130.375,113.625 130.375,61.325 ; U1.36 132.625,55.45 130.375,57.7 130.375,61.275 ; 130.375,61.275 130.425,61.275 130.375,61.325 ; 130.375,61.275 130.375,61.325
CS_SD: J_SD.2 P1.2 R45.1 | length 46.4
  Top Layer w0.254: R45.1@108.695,100.484 110.309,100.484 ; P1.2 110.309,100.484 ; J_SD.2 113.825,119.925 110.975,117.075 110.975,101.48 110.309,100.814 110.309,100.484
GND: C1.1 C2.2 C4.1 C5.2 C7.1 C8.2 C10.1 C11.1 C12.1 C13.1 C14.1 C15.1 C16.1 C17.1 C20.1 C21.1 C23.1 C24.2 C25.1 C26.2 C27.1 C28.2 C51.1 D1.3 D2.3 D3.3 D4.3 D5.3 D6.3 D7.3 D8.3 IC_1.4 pad.1@128.375,53.05 pad.1@139.45,48.075 pad.1@140.873,67.577 pad.1@143.8,20.875 pad.1@143.475,75.6 pad.1@156.95,92.7 pad.2@145.425,85.175 pad.2@157.775,77.075 pad.3@157.875,60.625 pad.3@183.55,55.7 pad.4@157.875,53.7 pad.4@205.075,55.7 pad.5 pad.6 pad.7 pad.8 pad.9 pad.11 pad.12 R5.1 R6.2 R11.1 R12.2 R17.1 R18.2 R20.1 R21.2 R24.1 R25.2 R28.1 R29.2 R32.1 R33.2 R55.1 SW.B1 U1.2 U1.15 U1.17 U1.18 U1.26 U1.28
GND_SD: C31.1 C32.1 J_SD.1 J_SD.6 J_SD.8 J_SD.CD1 J_SD.G1 J_SD.G2 J_SD.G3 J_SD.MP1 P1.6 pad.1@105.65,105.35 pad.3@119.925,84.325 pad.4@121.8,100.75
GNDA: C18.1 C19.2 IC_11.2 IC_11.4 IC_ISO.2 IC_ISO.9 IC_ISO.10 IC_isopower.4 J15.07 pad.1@110.45,53.275 pad.1@113.575,12.65 pad.1@119.15,33.425 pad.2@110.35,42.725 USB_IN.1 | length 1.1
  Top Layer w0.254: J15.07@113.875,33.27 J15.07@113.875,33.68 ; IC_isopower.4@118.32,38.125 IC_isopower.4@119,38.125
IAN: C11.2 R22.1 U1.8 | length 22.3
  Top Layer w0.254: U1.8 146.075,49.4 148.85,46.625 157.5,46.625 C11.2
  Top Layer w0.508: R22.1 159.424,44.293 C11.2
IAP: C10.2 R19.2 U1.7 | length 12.5
  Top Layer w0.254: U1.7 145.625,52.7 145.625,48.95 147.991,46.584 C10.2
  Top Layer w0.508: R19.2 147.991,41.348 C10.2
IBN: C13.2 R26.1 U1.10 | length 36.3
  Top Layer w0.254: U1.10 147.075,51.1 150.025,48.15 172.475,48.15 174,46.625 174,45.402 174.325,45.077 174.1,44.852 C13.2
  Top Layer w0.508: R26.1 174.403,44.395 C13.2
IBP: C12.2 R23.2 U1.9 | length 25.6
  Top Layer w0.254: U1.9 146.575,50.775 149.8,47.55 162.075,47.55 162.893,46.732 C12.2
  Top Layer w0.508: C12.2 162.893,41.219 R23.2
ICN: C15.2 R30.1 U1.12 | length 51
  Top Layer w0.254: U1.12 148.25,53.95 152.275,49.925 186.9,49.925 190.177,46.648 C15.2
  Top Layer w0.508: R30.1 190.1,44.395 C15.2
ICP: C14.2 R27.2 U1.11 | length 39.4
  Top Layer w0.254: U1.11 148.075,53.45 152.05,49.475 176.55,49.475 178.159,47.866 C14.2
  Top Layer w0.508: C14.2 178.236,44.395 R27.2
INA: D1.2 D2.1 J24.2 J24.2_1 R21.1 R22.2 | length 31
  Top Layer w0.508: D2.1 D1.2 155.467,38.171 R22.2 159.597,37.998 R21.1
  Top Layer w1: J24.2_1 J24.2 155.61,27.16 155.685,27.235 159.646,31.852 R21.1@159.56,31.937
INB: D3.2 D4.1 J23.2 J23.2_1 R25.1 R26.2 | length 31.3
  Top Layer w0.508: D4.1 D3.2 170.647,38.146 R26.2 174.834,37.715 R25.1
  Top Layer w1: J23.2_1 J23.2 171.104,27.504 174.985,31.385 174.834,31.536 R25.1
INC: D5.2 D6.1 J22.2 J22.2_1 R29.1 R30.2 | length 31.6
  Top Layer w0.254: R30.2 190.1,32.453 R29.1
  Top Layer w0.508: D6.1 D5.2 185.897,38.146 R30.2
  Top Layer w1: J22.2_1 J22.2 186.725,27.475 190.5,31.25 190.5,31.463 190.4,31.563 R29.1
INN: C17.2 R34.1 U1.14 | length 69.1
  Top Layer w0.254: U1.14 150.025,54.95 153.3,51.675 203.35,51.675 206.646,48.379 C17.2
  Top Layer w0.508: R34.1 206.569,44.315 C17.2
INneutro: D7.2 D8.1 J21.2 J21.2_1 R33.1 R34.2 | length 31.7
  Top Layer w0.508: D8.1 D7.2 202.682,37.939 R34.2 207.25,37.258 R33.1
  Top Layer w1: J21.2_1 J21.2 202.219,26.219 207.402,31.402 R33.1@207.402,31.964
INP: C16.2 R31.2 U1.13 | length 56.5
  Top Layer w0.254: U1.13 149.85,54.45 153.175,51.125 191.575,51.125 194.571,48.129 C16.2
  Top Layer w0.508: C16.2 194.648,44.315 R31.2
IPA: D1.1 D2.2 J24.1 J24.1_1 R19.1 R20.2 | length 30.7
  Top Layer w0.254: R20.2 147.567,37.924 R19.1
  Top Layer w0.508: R20.2@147.6,31.419 R20.2@147.6,32.025 ; R19.1 151.824,38.298 D1.1 D2.2
  Top Layer w1: R20.2@147.6,31.419 150.61,28.409 J24.1 J24.1_1
IPB: D3.1 D4.2 J23.1 J23.1_1 R23.1 R24.2 | length 31
  Top Layer w0.508: R24.2@162.35,31.875 R24.2@162.369,31.856 ; R24.2 162.666,37.846 R23.1 166.877,38.146 D3.1 D4.2
  Top Layer w1: R24.2@162.369,31.856 166.104,28.121 J23.1 J23.1_1
IPC: D5.1 D6.2 J22.1 J22.1_1 R27.1 R28.2 | length 31.1
  Top Layer w0.508: R28.2 178.236,32.453 R27.1 182.127,38.146 D5.1 D6.2
  Top Layer w1: R28.2@177.662,31.837 181.725,27.774 J22.1 J22.1_1
IPneutro: D7.1 D8.2 J21.1 J21.1_1 R31.1 R32.2 | length 30.7
  Top Layer w0.508: R32.2@194.348,31.537 R32.2 194.648,32.373 R31.1 198.785,38.066 D7.1 D8.2
  Top Layer w1: 194.375,31.15 197.219,28.306 J21.1 J21.1_1
IRQ0: J1.1 L6.1 U1.31 | length 72.2
  Top Layer w0.254: U1.31 139.325,57.95 137.95,59.325 v1(137.95,97.125) 137.95,107.725 144.126,113.901 144.126,113.925 L6.1
  Bottom Layer w0.254: J1.1 128.075,97.125 v1(137.95,97.125)
IRQ1: J2.1 L5.1 U1.32 | length 73
  Top Layer w0.254: v1@136.25,90.425 136.25,58.7 137.5,57.45 U1.32 ; v1@136.25,90.435 136.25,91.175 ; v1@136.275,90.425 v1(136.265,90.435) 136.265,91.16 136.25,91.175 ; L5.1 136.25,108.796 136.25,91.175
  Bottom Layer w0.254: J2.1 v1(136.265,90.435)
MISO_ADE9000: IC_ISO.16 U1.38 | length 42.6
  Top Layer w0.254: IC_ISO.16 132.335,21.985 132.6,22.25 132.6,29.625 v1(133.125,30.15) ; v1(137.25,53.65) 138.05,54.45 U1.38
  Bottom Layer w0.254: v1(133.125,30.15) 133.125,33.6 137.25,37.725 v1(137.25,53.65)
MISO_low: IC_ISO.5 J12.1 J14.01 J15.04 | length 15.5
  Top Layer w0.254: J12.1 107.3,22.8 J14.01 113.605,25.425 J15.04 117.135,21.985 IC_ISO.5
MISO_SD: J_SD.7 P1.5 R44.1 | length 63.7
  Top Layer w0.254: J_SD.7 119.3,120.925 119.3,114.05 122.275,111.075 122.275,105.475 117.178,100.378 117.178,78.856 117.929,78.105 P1.5 119.464,79.151 v1(119.464,80.137)
  Top Layer w0.508: R44.1 109.1,82.979 v1(109.1,80)
  Bottom Layer w0.508: v1(109.1,80) 119.325,80 119.326,79.999 v1(119.464,80.137)
MOSI_ADE9000: IC_ISO.17 U1.39 | length 40.3
  Top Layer w0.254: IC_ISO.17 131.055,23.255 131.775,23.975 131.775,30.5 132.925,31.65 v1(134.225,31.65) v1@133.94,31.365 ; v1(138.65,52.7) 138.65,52.875 139.725,53.95 U1.39
  Bottom Layer w0.254: v1(134.225,31.65) 134.225,33.325 138.65,37.75 v1(138.65,52.7)
MOSI_low: IC_ISO.4 J13.1 J14.02 J15.05 | length 15.1
  Top Layer w0.254: J13.1 109.91,27.95 J14.02 ; J14.02@110.15,28.01 J15.05 ; J15.05@113.875,28.19 113.875,27.475 117.915,23.435 IC_ISO.4@119.125,23.435
MOSI_SD: J_SD.3 P1.3 R42.1 | length 52.8
  Top Layer w0.254: v1(108.915,91.948) 109.031,92.064 R42.1 ; v1(111.59,88.773) 111.96,88.773 112.849,87.884 ; P1.3 112.849,87.884 ; J_SD.3 114.925,119.375 112.849,117.299 112.849,87.884
  Bottom Layer w0.508: v1(108.915,91.948) 108.915,91.448 v1(111.59,88.773)
N_V: FL4.1 J28.1 J28.2 | length 23.3
  Top Layer w1: FL4.1 183.817,115.269 205.8,115.269
NetC18_2: C18.2 IC_11.1 IC_11.3 USB_IN.5 | length 19.2
  Top Layer w0.508: USB_IN.5@109.564,63.169 111.309,63.169 ; 111.309,63.125 111.309,63.169 ; v1(111.691,61.448) 111.691,63.094 111.766,63.169 ; v1(111.837,68.919) IC_11.1@114.25,68.919 ; IC_11.3@114.25,67.019 114.153,66.922 113.722,66.491 113.722,64.416 112.475,63.169 111.766,63.169 ; 111.309,63.169 111.766,63.169
  Bottom Layer w0.508: v1(111.691,61.448) 111.691,68.773 v1(111.837,68.919)
NetC20_2: C20.2 OSC1.1 U1.30 | length 69.3
  Top Layer w0.254: U1.30 142.575,59 142.25,59.325 142.25,73.35 139.9,75.7 139.9,83.375 146.075,89.55 146.075,112.55 149.225,115.7 OSC1.1
  Top Layer w0.508: OSC1.1 151.1,117.84 C20.2
NetC21_2: C21.2 OSC1.2 U1.29 | length 57.3
  Top Layer w0.254: U1.29 143.075,73.8 140.5,76.375 140.5,82.925 147.925,90.35 147.925,105.8 C21.2
  Top Layer w0.508: C21.2 147.7,109.56 OSC1.2
NetC23_2: C23.2 C24.1 U1.16 | length 24.2
  Top Layer w0.254: U1.16 168.077,55.95 C24.1@168.825,56.698 ; C23.2 C24.1@168.825,56.698 ; C24.1 C24.1@168.825,56.698
NetC25_2: C25.2 C26.1 U1.25 | length 22.3
  Top Layer w0.254: C26.1 C25.2 145.15,58.725 U1.25
NetC27_2: C27.2 C28.1 U1.3 | length 23.6
  Top Layer w0.254: C28.1 141.32,33.345 C27.2 v1(141.375,36.65) ; v1(141.925,50.425) 142.225,50.425 143.575,51.775 U1.3
  Bottom Layer w0.254: v1(141.375,36.65) 141.375,49.575 142.125,50.325 142.025,50.425 v1(141.925,50.425)
NetC51_2: C51.2 R54.1 R55.2 | length 9.7
  Top Layer w0.508: C51.2 155.925,116.072 R55.2 R54.1
NetFL1_1: FL1.1 R1.2 | length 2.6
  Top Layer w0.508: R1.2 R1.2@178.695,102.011
  Top Layer w1: R1.2@178.695,102.011 FL1.1
NetFL2_1: FL2.1 R7.2 | length 2.6
  Top Layer w0.508: R7.2 R7.2@178.792,86.36
  Top Layer w1: R7.2@178.792,86.36 FL2.1
NetFL3_1: FL3.1 R13.2 | length 2.6
  Top Layer w0.508: FL3.1@180.968,71.114 FL3.1
  Top Layer w1: R13.2 FL3.1@180.968,71.114
NetFL4_2: FL4.2 R51.2 | length 2.6
  Top Layer w0.508: R51.2 R51.2@178.695,116.205
  Top Layer w1: R51.2@178.695,116.205 FL4.2
NetIC_1_1: IC_1.1 IC_1.3 IC_isopower.6 J17.1 | length 15.2
  Top Layer w0.254: J17.1 129.95,44.2 129.95,40.125 130.725,39.35 ; IC_isopower.6 128.61,39.35 130.725,39.35 ; IC_1.3 133.95,40.525 133.5,40.975 132.45,40.975 132.075,40.6 132.075,39.625 IC_1.1 131.775,39.325 131.75,39.35 130.725,39.35
NetIC_1_2: IC_1.2 IC_isopower.5 J19.1 | length 9.1
  Top Layer w0.254: J19.1 129.35,37.07 IC_isopower.5 131.795,37.945 133,39.15 IC_1.2
NetIC_ISO_11: IC_ISO.11 IC_ISO.12 IC_ISO.19 J16.1 | length 29.5
  Top Layer w0.254: IC_ISO.12 IC_ISO.11 131.553,15.635 J16.1 132.503,13.6 v1(129.875,13.6) ; IC_ISO.19 129.67,25.795 129.841,25.966 129.841,28.384 129.65,28.575 v1(129.538,28.575)
  Bottom Layer w0.254: v1(129.538,28.575) 129.538,13.938 v1(129.875,13.6)
NetIC_ISO_20: IC_ISO.20 J18.1 | length 4.3
  Top Layer w0.254: J18.1@128.25,31.275 128.25,27.165 IC_ISO.20
NetIC_isopower_1: IC_isopower.1 IC_isopower.2 | length 1.3
  Top Layer w0.254: IC_isopower.2@119,40.665 IC_isopower.1@119,41.935
NetIC_isopower_7: IC_isopower.7 IC_isopower.8 | length 1.3
  Top Layer w0.254: IC_isopower.7 IC_isopower.8
NetL1_2: L1.2 R36.1 | length 3.6
  Top Layer w0.254: L1.2 130.8,119.225 R36.1
NetL2_2: L2.2 R37.1 | length 3.6
  Top Layer w0.254: L2.2 133.55,119.225 R37.1
NetL3_2: L3.2 R38.1 | length 3.6
  Top Layer w0.254: L3.2 136.3,119.225 R38.1
NetL4_2: L4.2 R39.1 | length 3.6
  Top Layer w0.254: L4.2 139.051,119.225 R39.1
NetL5_2: L5.2 R40.1 | length 3.6
  Top Layer w0.254: L5.2 141.775,119.225 R40.1
NetL6_2: L6.2 R41.1 | length 3.6
  Top Layer w0.254: L6.2 144.551,119.225 R41.1
NetR1_1: R1.1 R2.2 | length 3.2
  Top Layer w1: R2.2@174.371,104.878 177.546,104.878
NetR2_1: R2.1 R3.2 | length 3.2
  Top Layer w1: R3.2@170.434,101.878 R2.1@173.609,101.878
NetR3_1: R3.1 R4.2 | length 3.2
  Top Layer w1: 166.497,104.878 R3.1@169.672,104.878
NetR7_1: R7.1 R8.2 | length 4.4
  Top Layer w1: R8.2 R7.1
NetR8_1: R8.1 R9.2 | length 4.4
  Top Layer w1: R9.2 R8.1
NetR9_1: R9.1 R10.2 | length 4.4
  Top Layer w1: R10.2 R9.1
NetR13_1: R13.1 R14.2 | length 4.4
  Top Layer w1: R14.2 R13.1
NetR14_1: R14.1 R15.2 | length 4.4
  Top Layer w1: R15.2 R14.1
NetR15_1: R15.1 R16.2 | length 4.4
  Top Layer w1: R16.2 R15.1
NetR51_1: R51.1 R52.2 | length 4.4
  Top Layer w1: R52.2 R51.1
NetR52_1: R52.1 R53.2 | length 4.4
  Top Layer w1: R53.2 R52.1
NetR53_1: R53.1 R54.2 | length 4.4
  Top Layer w1: R54.2 R53.1
PM1: IC_ISO.14 U1.5 | length 46.2
  Top Layer w0.254: IC_ISO.14 133.22,19.445 134.25,20.475 134.25,26.4 136.35,28.5 142.05,28.5 144.575,31.025 U1.5
PM1_low: IC_ISO.7 J15.02 | length 5.6
  Top Layer w0.254: J15.02 114.595,19.445 IC_ISO.7
SCK_SD: J_SD.5 P1.4 R43.1 | length 58.8
  Top Layer w0.254: v1(108.915,86.741) 109.031,86.857 R43.1 ; v1(114.003,81.153) 115.273,79.883 115.389,79.883 ; P1.4 115.389,79.883 ; J_SD.5 117.225,120.85 117.225,113.2 120.65,109.775 120.65,105.25 115.389,99.989 115.389,79.883
  Bottom Layer w0.508: v1(108.915,86.741) 108.915,86.241 v1(114.003,81.153)
SCLK: IC_ISO.18 U1.37 | length 41.1
  Top Layer w0.254: IC_ISO.18 130.3,24.525 130.875,25.1 130.875,31.225 132.25,32.6 v1(132.25,34.625) ; v1(135.6,54.55) 135.85,54.55 136.25,54.95 U1.37
  Bottom Layer w0.254: v1(132.25,34.625) 132.5,34.375 135.6,37.475 v1(135.6,54.55)
SCLK_low: IC_ISO.3 J11.1 J14.03 J15.06 | length 17.8
  Top Layer w0.254: J11.1 106.25,32.825 107.975,32.825 110.225,30.575 114.03,30.575 115.85,28.755 115.85,27 118.325,24.525 IC_ISO.3 118.945,24.525 IC_ISO.3@119.125,24.705
VA: FL3.2 J25.1 J25.2 | length 24
  Top Layer w1: FL3.2 185.421,68.707 205.8,68.707
VAP: C7.2 C9.2 R16.1 R17.2 U1.20 | length 33.1
  Top Layer w0.254: U1.20 148.85,57.95 149.5,58.6 149.5,69.9 150.876,71.276 C9.2 C9.2@150.876,70.45
  Top Layer w0.508: C9.2 153.771,73.891 C7.2 155.798,74.114 R17.2 164.036,71.114 R16.1
VB: FL2.2 J26.1 J26.2 | length 23.8
  Top Layer w1: FL2.2 185.013,84.228 205.8,84.228
VBP: C4.2 C6.2 R10.1 R11.2 U1.22 | length 46.5
  Top Layer w0.254: U1.22 146.575,59.15 148.3,60.875 148.3,72.8 148.807,73.307 148.807,84.675 C6.2
  Top Layer w0.508: C6.2 153.162,89.03 C4.2 155.598,89.007 R11.2 163.913,86.13 R10.1
VC: FL1.2 J27.1 J27.2 | length 24
  Top Layer w0.254: FL1.2@182.881,101.727 FL1.2
  Top Layer w1: FL1.2@182.881,101.727 184.86,99.748 205.8,99.748
VCP: C1.2 C3.2 R4.1 R5.2 U1.24 | length 64.3
  Top Layer w0.254: U1.24 145.575,60.8 147,62.225 147,87.925 148.8,89.725 148.8,101.025 150.368,102.593 C3.2 C3.2@150.368,101.55
  Top Layer w0.508: C3.2 152.778,104.648 C1.2 160.809,104.648 R5.2 164.033,101.878 R4.1
VN1: C8.1 C9.1 R18.1 U1.19 | length 24.7
  Top Layer w0.254: U1.19 149.975,57.45 150.876,58.351 C9.1
  Top Layer w0.508: C9.1 153.793,65.279 C8.1 161.013,65.279 R18.1
VN2: C5.1 C6.1 R12.1 U1.21 | length 38
  Top Layer w0.254: U1.21 148.85,60.425 148.85,72.075 150.368,73.593 C6.1
  Top Layer w0.508: C6.1 153.289,80.515 C5.1 155.598,80.538 R12.1
VN3: C2.1 C3.1 R6.1 U1.23 | length 54.6
  Top Layer w0.254: U1.23 146.075,60.3 147.575,61.8 147.575,87.575 150.368,90.368 C3.1
  Top Layer w0.508: C3.1 153.67,96.136 C2.1 155.802,96.036 R6.1
pads on no net: U1.41 USB_IN.2 USB_IN.3 USB_IN.4 USB_IN.S1 USB_IN.S2 USB_IN.S3 USB_IN.S4 USB_IN.S5 USB_IN.S6

## Polygon pours and split planes (outlines as drawn)
GNDA on Top Layer "Top Layer-gnda" (solid, remove dead copper, pour order 24): 104.125,71.15 120.7,71.15 120.7,11.125 109.725,11.125 109.725,16.375 104.149,16.375
GND_SD on Top Layer "Top Layer-No Net" (solid, remove dead copper, pour order 10): 104.425,122.175 123.4,122.175 123.4,72.925 104.425,72.925
GND on Top Layer "Top Layer-gnd" (solid, remove dead copper, pour order 18): 126.013,126.45 162.905,126.45 162.905,60.59 214.25,60.59 214.25,30.75 145.63,30.75 145.63,10.8 126.255,10.8 126.255,126.965 125.255,127.965
GNDA on Bottom Layer "Bottom Layer-gnda" (solid, remove dead copper, pour order 22): 104.299,71.175 120.7,71.175 120.7,11.125 109.7,11.125 109.7,16.425 104.201,16.425
GND_SD on Bottom Layer "Bottom Layer-GNDSD" (solid, remove dead copper, pour order 12): 123.425,122.225 123.425,73.275 123.275,73.125 104.5,73.125 104.5,122.225
GND on Bottom Layer "Bottom Layer-gnd" (solid, remove dead copper, pour order 20): 126.225,126.45 162.8,126.45 162.8,60.15 162.925,60.025 214.25,60.025 214.25,30.725 145.575,30.725 145.575,10.8 126.225,10.8

## Other copper
Top Layer:
  text "IRQ0" at 127.275,99 h0.5
  text "IRQ1" at 127.35,92.225 h0.5
  text "CF1" at 127.425,85.525 h0.5
  text "CF2" at 127.35,78.7 h0.5
  text "3V3" at 107.95,75.35 h0.5 r270
  text "SS" at 110.392,75.35 h0.5 r270
  text "MOSI" at 112.625,75.35 h0.5 r270
  text "SCLK" at 115.15,75.35 h0.5 r270
  text "MISO" at 117.65,75.35 h0.5 r270
  text "GND" at 120.275,75.35 h0.5 r270
  text "CF3" at 127.45,72.075 h0.5
  text "CF4" at 127.325,65.375 h0.5
  text "VCCb" at 127.15,48.375 h0.5
  text "GNDb" at 130.075,36.175 h0.5
  text "SCLK" at 105.15,34.8 h0.5
  text "VCCa" at 126.6,32.9 h0.5
  text "MOSI" at 105.15,29.775 h0.5
  text "MISO" at 105.15,24.7 h0.5
  text "GNDa" at 132.2,11.875 h0.5
Bottom Layer:
  text "NEUTRO" at 171.45,111.633 h1.52
  text "FASE C" at 171.45,95.504 h1.52
  text "FASE B" at 171.577,80.518 h1.52
  text "FASE A" at 171.577,65.659 h1.52
  text "IN" at 198.65,28.325 h1.52
  text "IB" at 167.275,28.275 h1.52
  text "IC" at 182.8,28.2 h1.52
  text "IA" at 152,28 h1.52

## Silkscreen, mask and mechanical layers (free items; w line width, h text height)
Mechanical 1:
  the board outline again, w0.24

## Dimensions
139.5,13.4 to 139.5,18.4 on Mechanical 1
214.325,126.375 to 214.25,10.8 on Bottom Layer
104.1,126.45 to 214.25,126.45 on Bottom Layer

## Text inside footprints (layer, text, board x,y; h text height)
P1: Top Overlay "1" at 104.679,76.981 h1.97; Top Overlay "6" at 122.53,76.981 h1.97; Mechanical 40 "2.540" at 99.616,77.489 h0.39; Mechanical 40 "2.540" at 105.204,79.33 h0.39; Mechanical 40 "15.240" at 113.319,73.234 h0.39; Mechanical 40 "12.700" at 113.319,80.791 h0.39; Mechanical 16 "1" at 104.679,76.981 h1.97; Mechanical 16 "6" at 122.53,76.981 h1.97
USB_IN: Mechanical 13 "PCB END" at 104.614,66.375 h0.5 r270